# Altium PCB MB.PcbDoc (part 3 of 3)
Units mil, origin at the board's own origin, x right, y up, seen from the top; angles counter-clockwise.
Board outline 5718.69 x 3947.04 mil, 2 copper layers (Top Layer, Bottom Layer); 146 components, 154 nets, 660 pads, 249 vias.
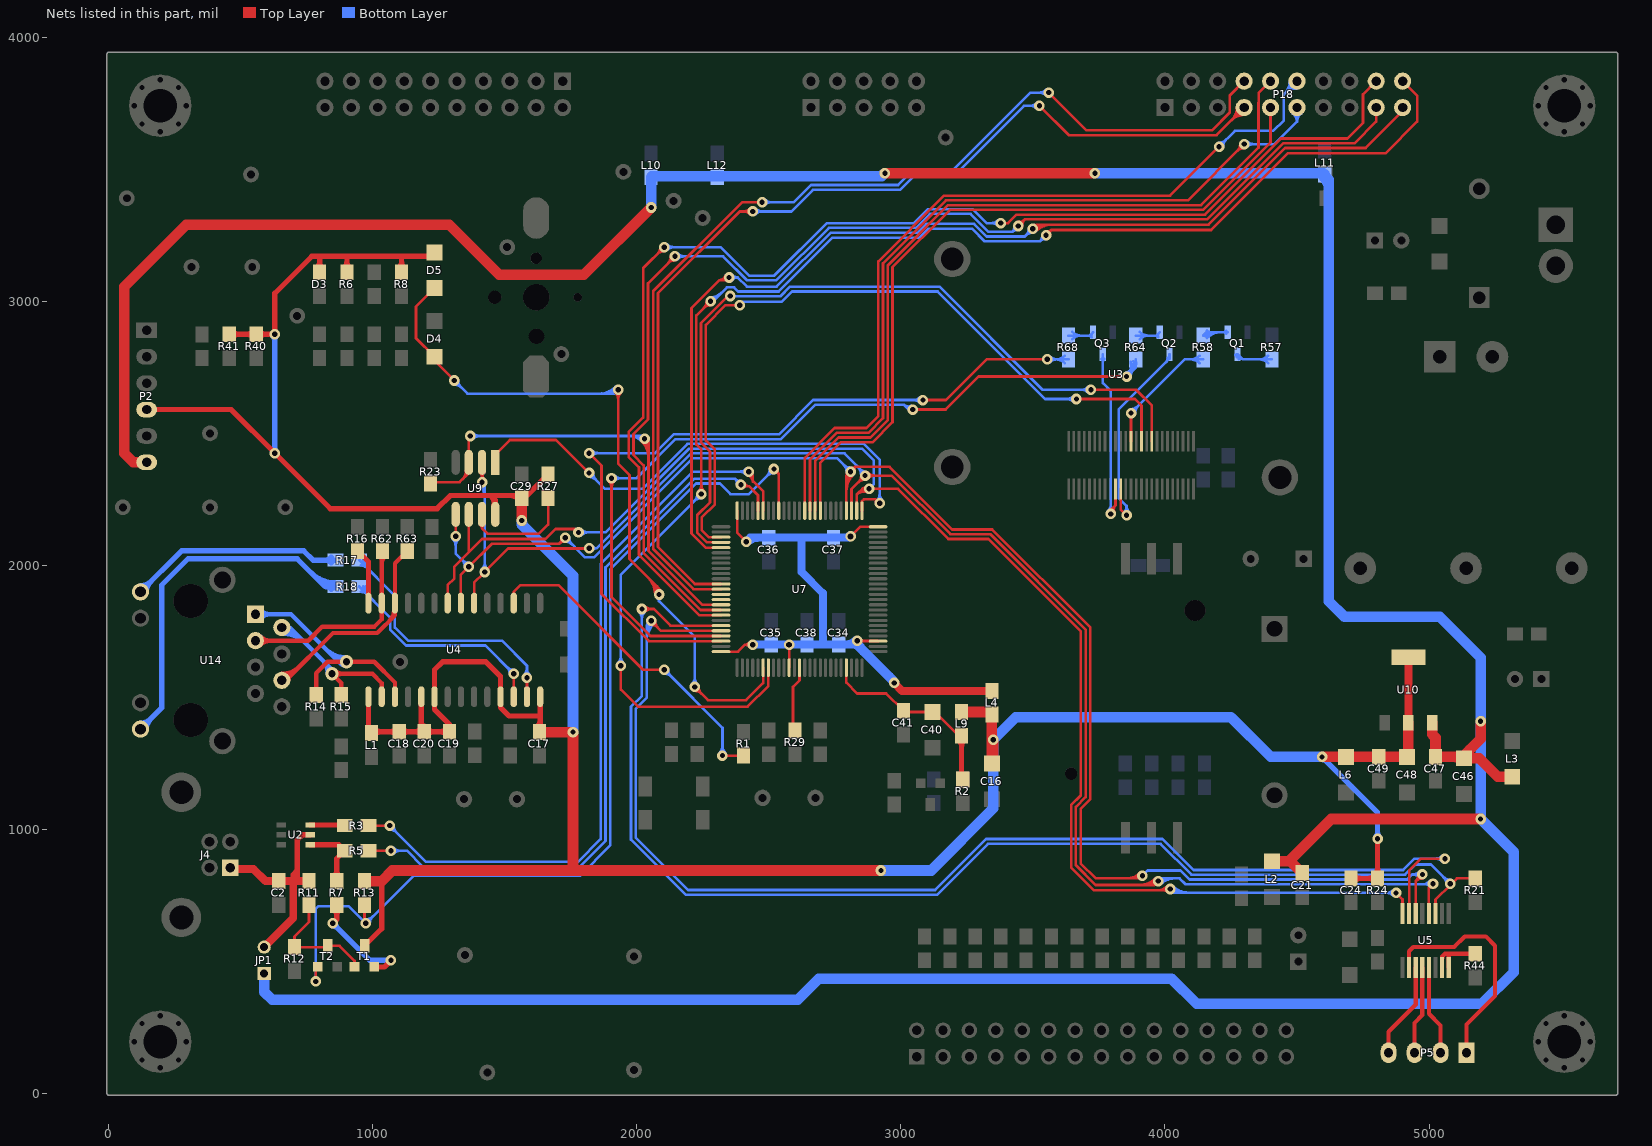
[diagram p3: the nets of this part, all layers, seen from the top]

## Via types
v1: diameter 40, hole 20, Top Layer to Bottom Layer, 190 vias
v2: diameter 50, hole 28, Top Layer to Bottom Layer, 49 vias
v3: diameter 40, hole 22, Top Layer to Bottom Layer, 5 vias
v4: diameter 50, hole 30, Top Layer to Bottom Layer, 4 vias
v5: diameter 80, hole 35, Top Layer to Bottom Layer, 1 vias

## Nets (pads, with @x,y where several pads share a name; then routed paths per layer and width w, separated by ;. In a path a pad name is that pad's centre, name@x,y a point inside that pad or via, vN(x,y) a via of type N, cw(c..) or ccw(c..) an arc to the next point about the centre after c; other vN are vias at no path point) (continued)
NetP18_7: P18.7 U7.87 | length 4200.9
  Top Layer w10: U7.87@2319.65,1929.72 2220.72,1929.72 2081,2069.44 2081,3030.54 2390.46,3340 v1(2440,3340) ; v1@2429.39,3329.39 ccw(c2403.79,3303.79) 2403.79,3340 ccw(c2403.79,3376.21) v1@2429.39,3350.61 ; v1(3525,3740) 3635.96,3629.04 4195.89,3629.04 P18.7@4300,3733.15 ; P18.7@4272.5,3733.15 cw(c4206.11,3733.15) 4253.05,3686.2 cw(c4300,3639.26) P18.7@4300,3705.65 ; P18.7@4282.5,3733.15 cw(c4240.25,3733.15) 4270.13,3703.28 cw(c4300,3673.4) P18.7@4300,3715.65
  Bottom Layer w10: v1(2440,3340) 2585.9,3340 2667.9,3422 2997.44,3422 3050.44,3475 3201.35,3475 3466.35,3740 v1(3525,3740) ; v1@2450.61,3329.39 cw(c2476.21,3303.79) 2476.21,3340 cw(c2476.21,3376.21) v1@2450.61,3350.61 ; v1@3514.39,3729.39 ccw(c3488.79,3703.79) 3488.79,3740 ccw(c3488.79,3776.21) v1@3514.39,3750.61
NetP18_8: P18.8 U7.88 | length 4131.9
  Top Layer w10: U7.88@2319.65,1910.04 2214.95,1910.04 2063,2061.99 2063,3038 2400,3375 v1(2475,3375) ; v1(3560,3790) 3702.96,3647.04 4178.24,3647.04 4245.5,3714.3 4245.5,3778.65 P18.8@4300,3833.15
  Bottom Layer w10: v1(2475,3375) 2595.44,3375 2660.44,3440 2989.99,3440 3042.99,3493 3193.9,3493 3490.9,3790 v1(3560,3790) ; v1@2485.61,3364.39 cw(c2511.21,3338.79) 2511.21,3375 cw(c2511.21,3411.21) v1@2485.61,3385.61 ; v1@3549.39,3779.39 ccw(c3523.79,3753.79) 3523.79,3790 ccw(c3523.79,3826.21) v1@3549.39,3800.61
NetP18_9: P18.9 U7.59 | length 2863.7
  Top Layer w10: U7.59@2695.63,2207.28 2695.63,2389.26 2772.37,2466 2892.37,2466 2968.87,2542.5 2968.87,3128.87 3186,3346 4144.63,3346 4400,3601.37 P18.9@4400,3733.15
NetP18_10: P18.10 U7.60 | length 2971.8
  Top Layer w10: U7.60@2675.94,2207.28 2675.94,2395.03 2764.91,2484 2884.91,2484 2950.87,2549.96 2950.87,3136.32 3178.54,3364 4137.18,3364 4354.5,3581.32 4354.5,3752.5 4355,3753 4355,3788.15 P18.10@4400,3833.15
NetP18_11: P18.11 U7.61 | length 3195.1
  Top Layer w10: U7.61@2656.26,2207.28 2656.26,2400.8 2757.46,2502 2877.46,2502 2932.87,2557.41 2932.87,3143.78 3171.09,3382 4087,3382 v1(4300,3595) ; v1@4285,3595 cw(c4248.79,3595) 4274.39,3569.39 cw(c4300,3543.79) v1@4300,3580
  Bottom Layer w10: v1(4300,3595) 4415,3595 4500,3680 ; v1@4310.61,3584.39 cw(c4336.21,3558.79) 4336.21,3595 cw(c4336.21,3631.21) v1@4310.61,3605.61 ; P18.11@4484.12,3710.7 cw(c4462.39,3680) 4500,3680 ; P18.11@4489.89,3718.86 cw(c4476.07,3699.33) 4500,3699.33 cw(c4523.93,3699.33) P18.11@4510.11,3718.86 ; P18.11@4500,3733.15 4500,3680 ; P18.11@4515.88,3710.7 ccw(c4537.61,3680) 4500,3680
NetP18_12: P18.12 U7.62 | length 3282.1
  Top Layer w10: U7.62@2636.57,2207.28 2636.57,2406.57 2750,2520 2870,2520 2914.87,2564.87 2914.87,3151.23 3163.63,3400 4020,3400 v1(4205,3585)
  Bottom Layer w10: v1(4205,3585) 4265,3645 4410,3645 4450,3685 4450,3783.15 P18.12@4500,3833.15 ; v1@4205,3600 ccw(c4205,3636.21) 4230.61,3610.61 ccw(c4256.21,3585) v1@4220,3585 ; P18.12@4472.5,3833.15 cw(c4406.11,3833.15) 4453.05,3786.2 cw(c4500,3739.26) P18.12@4500,3805.65 ; P18.12@4482.5,3833.15 cw(c4440.25,3833.15) 4470.13,3803.28 cw(c4500,3773.4) P18.12@4500,3815.65
NetP18_17: P18.17 U7.92 | length 4850.4
  Top Layer w10: v1@2130,3170 cw(c2093.79,3170) 2119.39,3144.39 cw(c2145,3118.79) v1@2145,3155 ; v1(2145,3170) 2043,3068 2043,2552.54 1988,2497.54 1988,2417.91 2027,2378.91 2027,2047.07 2242.78,1831.3 U7.92@2319.65,1831.3 ; v1(3445,3285) 3470,3310 ; v1@3445.26,3300 ccw(c3445.84,3334.15) 3470,3310 ; v1@3460,3285.26 cw(c3494.15,3285.84) 3470,3310 ; P18.17@4800,3733.15 4800,3680 4718,3598 4447.54,3598 4159.54,3310 3470,3310
  Bottom Layer w10: v1(2145,3170) 2327.88,3170 2418.88,3079 2528.54,3079 2727.54,3278 3057.09,3278 3110.09,3331 3264.91,3331 3332.91,3263 3423,3263 ; v1@2155.61,3159.39 cw(c2181.21,3133.79) 2181.21,3170 cw(c2181.21,3206.21) v1@2155.61,3180.61 ; v1@3430.1,3283.31 cw(c3405.49,3280.51) 3423,3263 ; v1@3443.31,3270.1 ccw(c3440.51,3245.49) 3423,3263 ; v1(3445,3285) 3423,3263
NetP18_18: P18.18 U7.93 | length 4965.1
  Top Layer w10: v1@2090,3205 cw(c2053.79,3205) 2079.39,3179.39 cw(c2105,3153.79) v1@2105,3190 ; v1(2105,3205) 2025,3125 2025,2560 1970,2505 1970,2410.46 2009,2371.46 2009,2039.62 2237,1811.61 U7.93@2319.65,1811.61 ; v1(3379,3296) 3406,3296 3438,3328 4152.09,3328 4440.09,3616 4691,3616 4750,3675 4750,3783.15 P18.18@4800,3833.15
  Bottom Layer w10: v1(2105,3205) 2318.33,3205 2426.33,3097 2521.09,3097 2720.09,3296 3049.63,3296 3102.63,3349 3272.37,3349 3325.37,3296 v1(3379,3296) ; v1@2115.61,3194.39 cw(c2141.21,3168.79) 2141.21,3205 cw(c2141.21,3241.21) v1@2115.61,3215.61 ; v1@3368.39,3285.39 ccw(c3342.79,3259.79) 3342.79,3296 ccw(c3342.79,3332.21) v1@3368.39,3306.61
NetP18_19: P18.19 U7.80 | length 4394
  Top Layer w10: U7.80@2319.65,2067.52 2261.11,2067.52 2208,2120.63 2208,2974.67 2313.33,3080 ; 2328,3080 ccw(c2328,3098.63) v1@2345.35,3091.83 ; v1@2336.04,3095.48 cw(c2313.33,3104.39) 2313.33,3080 ; v1(2350,3090) 2340,3080 2313.33,3080 ; v1@3496.46,3278.54 cw(c3524.14,3250.86) 3524.14,3290 ; v1(3500,3275) 3515,3290 ; v1@3503.54,3271.46 cw(c3548.28,3226.72) 3548.28,3290 ; v1@3506.47,3288.54 ccw(c3509.7,3295.3) 3515,3290 ; v1@3510.61,3264.39 cw(c3572.43,3202.57) 3572.43,3290 ; v1@3513.54,3281.47 cw(c3520.3,3284.7) 3515,3290 ; P18.19@4900,3733.15 4900,3720 4760,3580 4455,3580 4165,3290 3515,3290
  Bottom Layer w10: v1(2350,3090) 2382.42,3090 ; v1@2361.43,3080.29 cw(c2382.42,3062.47) 2382.42,3090 ; v1@2361.43,3099.71 ccw(c2382.42,3117.53) 2382.42,3090 ; v1@3485,3275 cw(c3448.79,3275) 3474.39,3249.39 cw(c3500,3223.79) v1@3500,3260 ; v1(3500,3275) 3470,3245 3325.46,3245 3277.46,3293 3097.54,3293 3064.54,3260 2735,3260 2530,3055 2417.42,3055 2382.42,3090
NetP18_20: P18.20 U7.7 | length 5894.6
  Top Layer w10: v1(1940,1620) 1940,1530 2005,1465 2420,1465 2498.78,1543.78 U7.7@2498.78,1612.8 ; v1@2234.39,2280.61 ccw(c2208.79,2306.21) 2245,2306.21 ccw(c2281.21,2306.21) v1@2255.61,2280.61 ; v1(2245,2270) 2245,2438.63 2226,2457.63 2226,2946 v1(2280,3000) ; v1@2265,3000 cw(c2228.79,3000) 2254.39,2974.39 cw(c2280,2948.79) v1@2280,2985 ; v1(3550,3250) 3570,3270 ; v1@3552.83,3264.73 ccw(c3556.45,3283.55) 3570,3270 ; v1@3564.73,3252.83 cw(c3583.55,3256.45) 3570,3270 ; P18.20@4900,3833.15 4955,3778.15 4955,3680 4835,3560 4465,3560 4175,3270 3570,3270
  Bottom Layer w10: v1@1929.39,1630.61 ccw(c1903.79,1656.21) 1940,1656.21 ccw(c1976.21,1656.21) v1@1950.61,1630.61 ; v1(1940,1620) 1940,1965 v1(2245,2270) ; v1@2230,2270 cw(c2193.79,2270) 2219.39,2244.39 cw(c2245,2218.79) v1@2245,2255 ; v1(2280,3000) 2288.33,3000 2341.33,3053 2368.67,3053 2384.67,3037 2537.46,3037 2740.46,3240 3070,3240 3105,3275 3270,3275 3318,3227 3527,3227 ; v1@2280,3005 ccw(c2280,3037.18) 2302.76,3014.43 ; v1@2280,3015 ccw(c2280,3071.33) 2319.83,3031.5 ; v1@2295,3000 cw(c2311.1,3000) 2299.72,3011.38 ; v1@3535.05,3248.82 cw(c3507.37,3246.63) 3527,3227 ; v1@3548.82,3235.05 ccw(c3546.63,3207.37) 3527,3227 ; v1(3550,3250) 3527,3227
NetQ1_1: Q1.1 R58.2 | length 239.1
  Bottom Layer w10: R58.2@4145,2870 4157.68,2882.68 Q1.1@4237.6,2882.68 ; R58.2@4152.07,2867.93 cw(c4187.68,2832.32) 4187.68,2882.68 ; R58.2@4159.14,2860.86 cw(c4211.82,2808.18) 4211.82,2882.68 ; R58.2@4159.14,2889.14 ccw(c4174.75,2904.75) 4174.75,2882.68 ; Q1.1@4232.78,2877.86 ccw(c4221.16,2866.23) 4221.16,2882.68 ccw(c4221.16,2899.12) Q1.1@4232.78,2887.49
NetQ1_3: Q1.3 R57.1 | length 260.4
  Bottom Layer w10: Q1.3@4266.79,2796.54 cw(c4272.58,2789.26) Q1.3@4279.16,2795.84 ; Q1.3@4273.01,2788.72 cw(c4279.6,2780.44) 4287.08,2787.92 ; Q1.3@4275,2800 4295,2780 ; Q1.3@4279.24,2780.89 cw(c4286.62,2771.62) 4295,2780 ; R57.1@4390.86,2765.86 ccw(c4356.72,2731.72) 4356.72,2780 ccw(c4356.72,2828.28) R57.1@4390.86,2794.14 ; R57.1@4405,2780 4295,2780
NetQ2_1: Q2.1 R64.2 | length 213.6
  Bottom Layer w10: R64.2@3890,2870 3967.6,2870 ; R64.2@3904.14,2855.86 cw(c3938.28,2821.72) 3938.28,2870 cw(c3938.28,2918.28) R64.2@3904.14,2884.14 ; 3960.9,2870 cw(c3960.9,2849.52) Q2.1@3975.38,2864 ; 3966.61,2870 ccw(c3966.61,2882.41) Q2.1@3975.38,2873.64 ; Q2.1@3974.04,2865.92 ccw(c3967.6,2862.89) 3967.6,2870 ; Q2.1@3975.12,2873.36 cw(c3967.6,2880.1) 3967.6,2870 ; Q2.1@3980.2,2882.6 3967.6,2870
NetQ2_3: Q2.3 U3.40 | length 884.2
  Top Layer w10: U3.40@3832.41,2289.08 3832.41,2212.59 v1(3855,2190)
  Bottom Layer w10: v1@3844.66,2200.86 ccw(c3821.67,2225) 3855,2225 ; v1(3855,2190) 3855,2225 ; v1@3865.34,2200.86 cw(c3888.33,2225) 3855,2225 ; 4003.47,2768.47 ccw(c3985.79,2786.14) Q2.3@4010.79,2786.14 ; Q2.3@4017.6,2799.92 4017.6,2782.6 3825,2590 3825,2255 3855,2225
NetQ3_1: Q3.1 R68.2 | length 216
  Bottom Layer w10: R68.2@3635,2870 3715,2870 ; R68.2@3649.14,2855.86 cw(c3683.28,2821.72) 3683.28,2870 cw(c3683.28,2918.28) R68.2@3649.14,2884.14 ; 3708.3,2870 cw(c3708.3,2849.52) Q3.1@3722.78,2864 ; 3714.01,2870 ccw(c3714.01,2882.41) Q3.1@3722.78,2873.64 ; Q3.1@3721.44,2865.92 ccw(c3715,2862.89) 3715,2870 ; Q3.1@3722.52,2873.36 cw(c3715,2880.1) 3715,2870 ; Q3.1@3727.6,2882.6 3715,2870
NetQ3_3: Q3.3 U3.41 | length 852
  Top Layer w10: v1(3795,2195) 3795,2210 3812.73,2227.73 ; v1@3799.48,2197.22 cw(c3815.57,2205.18) 3802.87,2217.87 ; v1@3808.44,2201.66 cw(c3828.74,2211.71) 3812.73,2227.73 ; U3.41@3812.73,2289.08 3812.73,2227.73
  Bottom Layer w10: Q3.3@3760.18,2781.33 cw(c3748.56,2769.7) 3765,2769.7 cw(c3781.44,2769.7) Q3.3@3769.82,2781.33 ; Q3.3@3765,2799.92 3765,2690 3795,2660 v1(3795,2195) ; v1@3784.39,2205.61 ccw(c3758.79,2231.21) 3795,2231.21 ccw(c3831.21,2231.21) v1@3805.61,2205.61
NetR1_2: R1.2 U4.3 | length 1388.1
  Top Layer w10: U4.3@1530.35,1889.92 ccw(c1521.65,1899.84) 1534.84,1899.84 ; U4.3@1534.84,1857.24 1534.84,1899.84 ; U4.3@1539.33,1889.92 cw(c1548.04,1899.84) 1534.84,1899.84 ; v1(2105,1605) 2025,1605 1705,1925 1560,1925 1534.84,1899.84 ; v1(2325,1280) R1.2@2405,1280
  Bottom Layer w10: v1@2105,1590 cw(c2105,1553.79) 2130.61,1579.39 cw(c2156.21,1605) v1@2120,1605 ; v1(2105,1605) 2325,1385 v1(2325,1280) ; v1@2314.39,1290.61 ccw(c2288.79,1316.21) 2325,1316.21 ccw(c2361.21,1316.21) v1@2335.61,1290.61
NetR3_1: R3.1 U7.70 | length 3080.8
  Top Layer w10: R3.1@985,1015 v1(1065,1015) ; v1@2421.49,2340.42 cw(c2415.84,2316.92) 2440,2316.92 ; v1@2423.83,2350.14 cw(c2418.89,2329.62) 2440,2329.62 ; v1(2425,2355) 2440,2340 ; v1@2431.47,2341.46 cw(c2434.7,2334.7) 2440,2340 ; v1@2438.54,2348.53 ccw(c2445.3,2345.3) 2440,2340 ; U7.70@2479.09,2207.28 2479.09,2280.91 2440,2320 2440,2340
  Bottom Layer w10: v1@1065,1000 cw(c1065,963.79) 1090.61,989.39 cw(c1116.21,1015) v1@1080,1015 ; v1(1065,1015) 1202,878 1777.54,878 1864,964.46 1864,2004.91 2214.09,2355 v1(2425,2355) ; v1@2414.39,2344.39 ccw(c2388.79,2318.79) 2388.79,2355 ccw(c2388.79,2391.21) v1@2414.39,2365.61
NetR3_2: R3.2 U2.6 | length 127.6
  Top Layer w20: U2.6@765,1017.4 R3.2@892.6,1017.4
NetR5_1: R5.1 U7.71 | length 2936.5
  Top Layer w10: R5.1@985,920 v1(1070,920) ; v1@2395,2300 2425,2300 ; v1@2405.61,2294.39 cw(c2419.14,2280.86) 2419.14,2300 ; v1@2408.85,2310.77 ccw(c2425,2317.5) 2425,2300 ; U7.71@2459.41,2207.28 2459.41,2265.59 2425,2300
  Bottom Layer w10: v1(1070,920) 1130,920 1190,860 1785,860 1882,957 1882,1992.46 2217.54,2328 2372,2328 ; v1@1080.61,909.39 cw(c1106.21,883.79) 1106.21,920 cw(c1106.21,956.21) v1@1080.61,930.61 ; v1@2380.05,2306.18 ccw(c2352.37,2308.37) 2372,2328 ; v1@2393.82,2319.95 cw(c2391.63,2347.63) 2372,2328 ; v1(2395,2305) 2372,2328
NetR5_2: R5.2 R7.1 U2.4 | length 323.7
  Top Layer w20: U2.4@765,942.6 872.4,942.6 R5.2@895,920 865,890 R7.1@865,805 ; R7.1@854.39,820.61 ccw(c828.79,846.21) 865,846.21 ccw(c901.21,846.21) R7.1@875.61,820.61
NetR7_2: R7.2 T1.2 | length 553.2
  Top Layer w20: v1(850,645) 865,660 ; v1@850.96,654.95 ccw(c852.63,672.37) 865,660 ; R7.2@854.39,699.39 cw(c828.79,673.79) 865,673.79 cw(c901.21,673.79) R7.2@875.61,699.39 ; v1@859.95,645.96 cw(c877.37,647.63) 865,660 ; R7.2@865,715 865,660 ; T1.2@1007,480 1045,480 v1(1070,505)
  Bottom Layer w20: v1@850,635 cw(c850,610.86) 867.07,627.93 cw(c884.14,645) v1@860,645 ; v1(850,645) 990,505 v1(1070,505)
NetR11_1: R11.1 R12.2 T1.1 T2.3 | length 428.5
  Top Layer w10: R12.2@705,555 825,555 T2.3@830,560 875,560 932,503 T1.1@932,480 ; 705,585 705,595 760,650 R11.1@760,715
NetR13_1: R13.1 T2.1 U7.67 | length 3838.4
  Top Layer w10: v1(785,425) 785,473 T2.1@792,480 ; R13.1@970,715 970,650 v1(975,645) ; v1(2520,2365) 2538.15,2346.85 ; v1@2524.04,2350.55 cw(c2527.92,2336.63) 2538.15,2346.85 ; v1@2534.45,2360.96 ccw(c2548.37,2357.08) 2538.15,2346.85 ; U7.67@2538.15,2207.28 2538.15,2346.85
  Bottom Layer w10: v1(785,425) 785,700 795,710 910,710 v1(975,645) 1155,825 1785,825 1900,940 1900,1985 2225,2310 2315,2310 2355,2270 2425,2270 v1(2520,2365) ; v1@975,660 ccw(c975,696.21) 1000.61,670.61 ccw(c1026.21,645) v1@990,645 ; v1@2505,2365 cw(c2468.79,2365) 2494.39,2339.39 cw(c2520,2313.79) v1@2520,2350
NetR14_2: R14.2 U4.17 U14.1 | length 1210
  Top Layer w16: R14.2@786.89,1510.04 786.89,1591.93 830,1635.04 v2(901.89,1635.04) 1006.89,1635.04 1084.84,1557.09 U4.17@1084.84,1502.91
  Bottom Layer w16: U14.1@556.89,1815.04 691.89,1815.04 871.89,1635.04 ; U14.1@574.21,1797.72 cw(c616.04,1755.89) 616.04,1815.04 cw(c616.04,1874.19) U14.1@574.21,1832.36 ; 821.66,1685.27 ccw(c901.89,1765.51) v2@901.89,1652.04 ; 848.97,1657.96 ccw(c901.89,1710.88) v2@901.89,1636.04 ; 876.28,1630.65 ccw(c901.89,1656.25) v2@901.89,1620.04 ; v2@887.31,1626.3 ccw(c871.89,1617.07) 871.89,1635.04 ; v2@887.31,1643.77 cw(c871.89,1653.01) 871.89,1635.04 ; v2(901.89,1635.04) 871.89,1635.04
NetR15_2: R15.2 U4.16 U14.2 | length 994.8
  Top Layer w16: v2@858.91,1578.02 cw(c887.93,1549) 887.93,1590.04 cw(c887.93,1631.08) v2@858.91,1602.06 ; R15.2@881.89,1510.04 881.89,1555.04 v2(846.89,1590.04) 999.84,1590.04 1034.84,1555.04 U4.16@1034.84,1502.91
  Bottom Layer w16: U14.2@656.89,1740.54 cw(c656.89,1608.96) 749.93,1702 ; U14.2@656.89,1756.54 cw(c656.89,1663.59) 722.61,1729.32 ; U14.2@656.89,1765.04 686.89,1765.04 846.89,1605.04 v2(846.89,1590.04) ; U14.2@656.89,1772.54 cw(c656.89,1718.22) 695.3,1756.63 ; 807.26,1644.67 cw(c752.63,1590.04) v2@829.89,1590.04 ; 834.58,1617.35 cw(c807.26,1590.04) v2@845.89,1590.04
NetR16_2: R16.2 U4.14 | length 214.8
  Top Layer w20: R16.2@943.89,2055.04 984.84,2014.09 U4.14@984.84,1857.24
NetR17_1: R17.1 U14.9 | length 958.9
  Bottom Layer w20: U14.9@121.97,1900.08 276.93,2055.04 740,2055.04 775.04,2020 R17.1@860,2020 ; U14.9@121.97,1922.58 ccw(c121.97,1976.9) 160.38,1938.49 ccw(c198.79,1900.08) U14.9@144.47,1900.08 ; R17.1@844.39,2009.39 ccw(c818.79,1983.79) 818.79,2020 ccw(c818.79,2056.21) R17.1@844.39,2030.61
NetR17_2: R17.2 U4.27 | length 1175
  Top Layer w10: U4.27@1580.03,1535.29 ccw(c1568.4,1546.92) 1584.84,1546.92 ccw(c1601.29,1546.92) U4.27@1589.66,1535.29 ; U4.27@1584.84,1502.91 v1(1584.84,1574.84)
  Bottom Layer w10: R17.2@950,2020 1085,1885 1085,1765 1135,1715 1490,1715 1584.84,1620.16 v1(1584.84,1574.84) ; R17.2@955,2000 cw(c955,1963.79) 980.61,1989.39 ; R17.2@965,2020 ccw(c1001.21,2020) 975.61,1994.39 ; R17.2@975,2020 ccw(c1035.36,2020) 992.68,1977.32 ; v1@1574.24,1585.45 ccw(c1548.63,1611.06) 1584.84,1611.06 ccw(c1621.06,1611.06) v1@1595.45,1585.45
NetR18_1: R18.1 U14.12 | length 1612.1
  Bottom Layer w20: U14.12@121.97,1380.08 201.89,1460 201.89,1925.04 301.89,2025.04 714.96,2025.04 820,1920 ; U14.12@121.97,1402.58 ccw(c121.97,1456.9) 160.38,1418.49 ccw(c198.79,1380.08) U14.12@144.47,1380.08 ; 769.64,1970.36 ccw(c855,2055.71) R18.1@855,1935 ; 803.79,1936.21 ccw(c855,1987.43) R18.1@855,1915 ; R18.1@844.14,1909.66 ccw(c820,1886.67) 820,1920 ; R18.1@844.14,1930.34 cw(c820,1953.33) 820,1920 ; R18.1@860,1920 820,1920
NetR18_2: R18.2 U4.26 | length 996.3
  Top Layer w10: U4.26@1534.84,1502.91 v1(1534.84,1589.84)
  Bottom Layer w10: R18.2@950,1920 1067,1803 1067,1757.54 1127.54,1697 1427.69,1697 v1(1534.84,1589.84) ; R18.2@955,1900 cw(c955,1863.79) 980.61,1889.39 ; R18.2@965,1920 ccw(c1001.21,1920) 975.61,1894.39 ; R18.2@975,1920 ccw(c1035.36,1920) 992.68,1877.32 ; v1@1519.84,1589.84 ccw(c1483.63,1589.84) 1509.24,1615.45 ccw(c1534.84,1641.06) v1@1534.84,1604.84
NetR21_1: R21.1 U5.11 U7.95 | length 4988.1
  Top Layer w10: v1(2020,1835) 2065,1835 2127.76,1772.24 U7.95@2319.65,1772.24 ; v1@2030.61,1824.39 cw(c2056.21,1798.79) 2056.21,1835 cw(c2056.21,1871.21) v1@2030.61,1845.61 ; U5.11@5024.39,682.4 5024.39,734.39 v1@5082.5,792.5 ; v1(5080,795) v1@5082.5,792.5 ; R21.1@5175,815 5105,815 v1@5082.5,792.5
  Bottom Layer w10: v1@2009.39,1824.39 cw(c1983.79,1798.79) 2020,1798.79 cw(c2056.21,1798.79) v1@2030.61,1824.39 ; v1(2020,1835) 2020,1506 1979,1465 1979,961.46 2187.46,753 3137.54,753 3330.54,946 3983.54,946 4100.54,829 4909.46,829 4947.96,867.5 5007.5,867.5 v1(5080,795) ; v1@5065,795 ccw(c5028.79,795) 5054.39,820.61 ccw(c5080,846.21) v1@5080,810
NetR23_1: R23.1 U7.91 U9.3 | length 2128.5
  Top Layer w10: R23.1@1220,2310 1225,2315 1330,2315 1365,2350 U9.3@1365,2390 1365,2485 v1(1370,2490) ; 1340.64,2325.64 ccw(c1307.77,2358.5) U9.3@1354.25,2358.5 ; 1357.71,2342.71 ccw(c1341.92,2358.5) U9.3@1364.25,2358.5 ; v1@2019.39,2469.39 cw(c1957.57,2407.57) 2045,2407.57 ; v1@2026.46,2476.46 cw(c1981.72,2431.72) 2045,2431.72 ; v1(2030,2480) 2045,2465 ; v1@2033.54,2483.54 cw(c2005.86,2455.86) 2045,2455.86 ; v1@2036.47,2466.46 cw(c2039.7,2459.7) 2045,2465 ; v1@2043.54,2473.53 ccw(c2050.3,2470.3) 2045,2465 ; U7.91@2319.65,1850.98 2248.55,1850.98 2045,2054.53 2045,2465
  Bottom Layer w10: v1(1370,2490) 2020,2490 v1(2030,2480) ; v1@1380.61,2479.39 cw(c1406.21,2453.79) 1406.21,2490 cw(c1406.21,2526.21) v1@1380.61,2500.61 ; 1969.64,2490 cw(c1969.64,2419.64) v1@2019.39,2469.39 ; 1993.79,2490 cw(c1993.79,2443.79) v1@2026.46,2476.46
NetR27_1: R27.1 U9.7 | length 421.2
  Top Layer w10: U9.7@1408.5,2153.09 cw(c1398.56,2140) 1415,2140 ; U9.7@1415,2158.15 1415,2140 ; U9.7@1421.5,2153.09 ccw(c1431.44,2140) 1415,2140 ; R27.1@1665,2255 1665,2155 1630,2120 1435,2120 1415,2140
NetR29_1: R29.1 U7.13 | length 251.4
  Top Layer w10: R29.1@2600,1375 2600,1390 2592,1398 2592,1540.11 2616.89,1565 U7.13@2616.89,1612.8
NetR44_2: R44.2 U5.7 U5.8 | length 237.6
  Top Layer w16: U5.7@5049.26,509.17 cw(c5073.62,509.17) 5056.4,526.4 ; U5.7@5049.39,477.68 5049.39,519.39 5060,530 R44.2@5175,530 ; U5.8@5074.39,477.68 5074.39,524.39
NetR58_1: R58.1 U3.13 | length 596.7
  Top Layer w10: U3.13@3871.78,2470.19 v1(3871.78,2576.78)
  Bottom Layer w10: v1(3871.78,2576.78) 4075,2780 R58.1@4145,2780 ; v1@3871.78,2591.78 ccw(c3871.78,2627.99) 3897.39,2602.39 ccw(c3922.99,2576.78) v1@3886.78,2576.78 ; R58.1@4130.86,2765.86 ccw(c4096.72,2731.72) 4096.72,2780 ccw(c4096.72,2828.28) R58.1@4130.86,2794.14
NetR62_2: R62.2 U4.13 U14.3 | length 929.8
  Top Layer w16: U14.3@556.89,1715.04 756.89,1715.04 810.06,1768.21 1008.21,1768.21 1034.84,1794.84 U4.13@1034.84,1857.24 1034.84,2051.99 R62.2@1037.89,2055.04 ; U14.3@574.21,1697.72 cw(c616.04,1655.89) 616.04,1715.04 cw(c616.04,1774.19) U14.3@574.21,1732.36 ; R62.2@1025.87,2038.02 cw(c1004.2,2016.35) 1034.84,2016.35 ; 1034.84,2001.64 cw(c1086.29,2001.64) R62.2@1049.91,2038.02
NetR63_2: R63.2 U4.12 U14.6 | length 973.7
  Top Layer w16: U14.6@656.89,1565.04 671.89,1565.04 851.06,1744.21 1018.15,1744.21 1084.84,1810.9 U4.12@1084.84,1857.24 1084.84,2007.99 R63.2@1131.89,2055.04 ; U14.6@656.89,1573.54 ccw(c656.89,1630.27) 697.01,1590.16 ; U14.6@656.89,1589.54 ccw(c656.89,1684.9) 724.32,1617.47 ; U14.6@681.39,1565.04 cw(c704.32,1565.04) 688.11,1581.26 ; 1065.05,1791.11 ccw(c1026.48,1829.68) U4.12@1081.03,1829.68
NetR64_1: R64.1 U7.97 | length 3615
  Top Layer w10: v1@1894.39,2319.39 cw(c1868.79,2293.79) 1905,2293.79 cw(c1941.21,2293.79) v1@1915.61,2319.39 ; v1(1905,2330) 1905,1880 2052.13,1732.87 U7.97@2319.65,1732.87 ; v1(3045,2590) 3170,2590 3295,2715 v1(3855,2715)
  Bottom Layer w10: v1(1905,2330) 2000,2330 2148,2478 2546,2478 2676,2608 3012,2608 ; v1@1915.61,2319.39 cw(c1941.21,2293.79) 1941.21,2330 cw(c1941.21,2366.21) v1@1915.61,2340.61 ; 3021.96,2598.04 ccw(c3034.88,2610.97) v1@3042.83,2594.5 ; v1@3038.48,2603.51 cw(c3028.4,2624.4) 3012,2608 ; v1(3045,2590) 3030,2590 3012,2608 ; v1@3851.74,2729.64 ccw(c3841.82,2774.16) R64.1@3881.32,2751.35 ; v1@3853.05,2729.87 ccw(c3850.02,2752.97) 3870.2,2741.32 ccw(c3890.37,2729.67) v1@3868.86,2720.75 ; v1@3853.91,2719.88 ccw(c3848.54,2744) 3869.94,2731.64 ; v1@3855,2730 ccw(c3855,2766.21) 3880.61,2740.61 ccw(c3906.21,2715) v1@3870,2715 ; v1@3867.61,2727.61 ccw(c3833.79,2761.43) R64.1@3880.28,2772.65 ; v1@3869.49,2718.88 cw(c3889.25,2724.18) 3871.53,2734.41 ; R64.1@3870.56,2770.31 cw(c3813.48,2756.52) v1(3855,2715) 3890,2750 R64.1@3890,2780 ; 3880.21,2740.21 ccw(c3854.1,2766.33) R64.1@3890,2775
NetR68_1: R68.1 U7.98 | length 3287.4
  Top Layer w10: v1(1820,2425) 1867,2378 1867,1892.54 2046.36,1713.19 U7.98@2319.65,1713.19 ; v1(3084,2626) 3171,2626 3325,2780 v1(3555,2780)
  Bottom Layer w10: v1(1820,2425) 2069.54,2425 2140.54,2496 2538.54,2496 2668.54,2626 v1(3084,2626) ; v1@1830.61,2414.39 cw(c1856.21,2388.79) 1856.21,2425 cw(c1856.21,2461.21) v1@1830.61,2435.61 ; v1@3073.39,2615.39 ccw(c3047.79,2589.79) 3047.79,2626 ccw(c3047.79,2662.21) v1@3073.39,2636.61 ; v1(3555,2780) R68.1@3635,2780 ; v1@3565.61,2769.39 cw(c3591.21,2743.79) 3591.21,2780 cw(c3591.21,2816.21) v1@3565.61,2790.61 ; R68.1@3620.86,2765.86 ccw(c3586.72,2731.72) 3586.72,2780 ccw(c3586.72,2828.28) R68.1@3620.86,2794.14
NetU3_15: U3.15 U7.78 | length 2967.4
  Top Layer w10: U7.78@2319.65,2106.89 2272.65,2106.89 2247,2132.54 2247,2182.46 2296,2231.46 2296,2438.54 2262,2472.54 2262,2909.88 2337.12,2985 v1(2390,2985) ; v1(3665,2630) 3886.15,2630 3911.15,2605 U3.15@3911.15,2470.19
  Bottom Layer w10: v1(2390,2985) 2403.63,2998.63 2550,2998.63 2588.37,3037 3139.84,3037 3546.84,2630 v1(3665,2630) ; v1@3654.39,2619.39 ccw(c3628.79,2593.79) 3628.79,2630 ccw(c3628.79,2666.21) v1@3654.39,2640.61
NetU3_17: U3.17 U7.79 | length 3075.1
  Top Layer w10: U7.79@2319.65,2087.2 2266.88,2087.2 2229,2125.09 2229,2189.91 2278,2238.91 2278,2431.09 2244,2465.09 2244,2917.33 2346.67,3020 v1(2355,3020) ; v1(3720,2665) 3890,2665 3950.52,2604.48 U3.17@3950.52,2470.19
  Bottom Layer w10: v1(2355,3020) 2356,3019 2544.91,3019 2580.91,3055 3147.29,3055 3537.29,2665 v1(3720,2665) ; v1@3709.39,2654.39 ccw(c3683.79,2628.79) 3683.79,2665 ccw(c3683.79,2701.21) v1@3709.39,2675.61
NetU5_15: U5.15 U7.96 | length 5011.9
  Top Layer w10: v1@2055,1775 cw(c2055,1738.79) 2080.61,1764.39 cw(c2106.21,1790) v1@2070,1790 ; v1(2055,1790) 2092.44,1752.56 U7.96@2319.65,1752.56 ; U5.15@4924.39,682.4 4924.39,844.39 4970,890 v1(5060,890)
  Bottom Layer w10: 2038,1712.75 cw(c2132.25,1712.75) v1@2065.61,1779.39 ; 2038,1736.89 cw(c2108.11,1736.89) v1@2058.54,1786.46 ; 2038,1761.03 cw(c2083.97,1761.03) v1@2051.46,1793.54 ; v1(2055,1790) 2038,1773 2038,1498.54 1997,1457.54 1997,968.91 2194.91,771 3130.09,771 3323.09,964 3991,964 4108,847 4902,847 4945,890 v1(5060,890) ; v1@5049.39,879.39 ccw(c5023.79,853.79) 5023.79,890 ccw(c5023.79,926.21) v1@5049.39,900.61
NetU7_51: U7.51 U9.1 | length 2089
  Top Layer w10: U9.1@1465,2390 1465,2420 1520,2475 1695,2475 v1(1820,2350) ; U7.51@2853.11,2207.28 2853.11,2243.11 2860,2250 2905,2250 ; v1@2906.46,2241.47 ccw(c2899.7,2244.7) 2905,2250 ; v1@2913.53,2248.54 cw(c2910.3,2255.3) 2905,2250 ; v1(2920,2235) 2905,2250
  Bottom Layer w10: v1@1820,2335 cw(c1820,2298.79) 1845.61,2324.39 cw(c1871.21,2350) v1@1835,2350 ; v1(1820,2350) 1880,2290 2021.81,2290 2191.81,2460 2860.46,2460 2920,2400.46 v1(2920,2235) ; v1@2909.39,2245.61 ccw(c2883.79,2271.21) 2920,2271.21 ccw(c2956.21,2271.21) v1@2930.61,2245.61
NetU7_89: U7.89
NetU7_90: U7.90
SPI_MISO: U4.6 U5.12 U7.53 U9.2 | length 6698.6
  Top Layer w10: U4.6@1384.84,1857.24 1384.84,1934.84 v1@1420,1970 ; U9.2@1407.4,2350.9 cw(c1389.05,2332.56) 1415,2332.56 cw(c1440.95,2332.56) U9.2@1422.6,2350.9 ; v1@1408.62,2328.57 ccw(c1402.46,2341.67) 1416.44,2337.93 ccw(c1423.92,2335.92) v1@1420.88,2328.8 ; v1@1409.12,2328.8 ccw(c1406.08,2335.92) 1413.56,2337.93 ccw(c1427.54,2341.67) v1@1421.38,2328.57 ; v1(1415,2315) U9.2@1415,2390 ; v1(1425,1975) 1514,2064 1819.91,2064 v1(1820.46,2064.54) ; U7.53@2813.74,2207.28 2813.74,2288.74 v1(2865,2340) 2965.46,2340 3187.46,2118 3338.81,2118 3699.9,1756.91 3699.9,1122.46 3663,1085.56 3663,864.88 3737.88,790 3960,790 ; v1@2850,2340 cw(c2813.79,2340) 2839.39,2314.39 cw(c2865,2288.79) v1@2865,2325 ; v1@2875.61,2329.39 cw(c2901.21,2303.79) 2901.21,2340 cw(c2901.21,2376.21) v1@2875.61,2350.61 ; 3902.57,790 ccw(c3902.57,877.43) v1@3964.39,815.61 ; 3926.72,790 ccw(c3926.72,853.28) v1@3971.46,808.54 ; 3950.86,790 ccw(c3950.86,829.14) v1@3978.54,801.46 ; v1@3961.46,798.53 cw(c3954.7,795.3) 3960,790 ; v1@3968.53,791.46 ccw(c3965.3,784.7) 3960,790 ; v1(3975,805) 3960,790 ; v1@5001.23,789.04 cw(c4993.21,785.57) 4999.39,779.39 ; U5.12@5001.89,684.9 U5.12@4999.39,682.4 4999.39,779.39 ; v1@5009.04,781.23 ccw(c5005.57,773.21) 4999.39,779.39 ; v1(5015,795) 4999.39,779.39
  Bottom Layer w10: v1@1404.39,2304.39 cw(c1354.64,2254.64) 1425,2254.64 ; v1@1411.46,2311.46 cw(c1378.79,2278.79) 1425,2278.79 ; v1@1414.39,1985.61 ccw(c1388.79,2011.21) 1425,2011.21 ccw(c1461.21,2011.21) v1@1435.61,1985.61 ; v1(1425,1975) 1425,2295 ; v1(1820.46,2064.54) 1847.27,2064.54 ; v1@1833.24,2056.7 cw(c1847.26,2048.09) 1847.26,2064.54 ; v1@1833.24,2072.39 ccw(c1847.26,2081) 1847.26,2064.54 ; 2834.68,2376.99 cw(c2797.69,2340) v1@2850,2340 ; 2850.78,2360.89 ccw(c2865,2375.11) v1@2865,2355 ; 2851.75,2359.92 cw(c2831.83,2340) v1@2860,2340 ; v1(2865,2340) 2865,2346.67 2787.67,2424 2206.72,2424 1847.27,2064.54 ; v1(3975,805) 3985,815 4055,815 4077,793 5013,793 v1(5015,795) ; v1@3978.54,801.46 cw(c4011.21,768.79) 4011.21,815 ; v1@3985.61,794.39 cw(c4035.36,744.64) 4035.36,815 ; 4973.96,793 ccw(c4973.96,836.04) v1@5004.39,805.61 ; 4983.62,793 cw(c4983.62,763.62) v1@5004.39,784.39 ; 1425,2295 1415,2305 v1(1415,2315) 1425,2305 1425,2295
SPI_MOSI: U4.7 U5.14 U7.54 U9.5 | length 6453.5
  Top Layer w10: v1(1315,2110) U9.5@1315,2158.15 ; U4.7@1334.84,1857.24 1334.84,1964.84 v1@1360,1990 ; v1(1365,1995) 1452,2082 1707,2082 ; v1@1715.05,2103.82 cw(c1687.37,2101.63) 1707,2082 ; v1@1728.82,2090.05 ccw(c1726.63,2062.37) 1707,2082 ; v1(1730,2105) 1707,2082 ; U7.54@2794.06,2207.28 2794.06,2339.06 ; 2794.06,2280.29 cw(c2884.71,2280.29) v1@2820.61,2344.39 ; 2794.06,2304.43 cw(c2860.57,2304.43) v1@2813.54,2351.46 ; 2794.05,2328.58 cw(c2836.42,2328.58) v1@2806.46,2358.54 ; v1@2796.12,2349.32 cw(c2787.38,2345.74) 2794.06,2339.06 ; v1@2804.32,2341.12 ccw(c2800.74,2332.38) 2794.06,2339.06 ; v1@2814.14,2369.42 ccw(c2818.03,2382.97) 2828,2373 ; v1@2824.42,2359.14 cw(c2837.97,2363.03) 2828,2373 ; 3854.64,815 ccw(c3854.64,885.36) v1@3904.39,835.61 ; 3878.79,815 ccw(c3878.79,861.21) v1@3911.46,828.54 ; v1(3915,825) 3905,815 3738.33,815 3681,872.33 3681,1078.1 3717.9,1115 3717.9,1764.37 3346.27,2136 3194.91,2136 2957.91,2373 2828,2373 ; U5.14@4949.39,682.4 4949.39,804.39 ; v1@4960,830 cw(c4923.79,830) 4949.39,804.39 ; v1@4975,815 ccw(c4975,778.79) 4949.39,804.39 ; v1(4975,830) 4949.39,804.39 ; 2794.06,2339.06 v1(2810,2355) 2828,2373
  Bottom Layer w10: v1@1304.39,2099.39 cw(c1278.79,2073.79) 1315,2073.79 cw(c1351.21,2073.79) v1@1325.61,2099.39 ; v1(1315,2110) 1315,2045 v1(1365,1995) ; v1@1350,1995 ccw(c1313.79,1995) 1339.39,2020.61 ccw(c1365,2046.21) v1@1365,2010 ; v1@1730,2090 cw(c1730,2053.79) 1755.61,2079.39 cw(c1781.21,2105) v1@1745,2105 ; v1(1730,2105) 1803.46,2031.54 1839.72,2031.54 2214.18,2406 2759,2406 v1(2810,2355) ; v1@2795,2355 ccw(c2758.79,2355) 2784.39,2380.61 ccw(c2810,2406.21) v1@2810,2370 ; v1(3915,825) 3935,845 4059.09,845 4093.09,811 4916.91,811 4935.91,830 v1(4975,830) ; v1@4964.39,819.39 ccw(c4938.79,793.79) 4938.79,830 ccw(c4938.79,866.21) v1@4964.39,840.61
SPI_SCK: U4.8 U5.16 U7.52 U9.6 | length 6059.6
  Top Layer w10: U4.8@1284.84,1857.24 1284.84,1925 1310,1950.16 1310,1995 1365,2050 ; U9.6@1365,2158.15 1365,2050 ; v1(1780,2125) 1767,2138 1693,2138 1655,2100 1415,2100 1365,2050 ; U7.52@2833.43,2207.28 2833.43,2268.43 ; 2843.85,2278.85 cw(c2865.77,2256.94) v1@2878.02,2285.41 ; 2854.28,2289.28 cw(c2872.05,2271.52) v1@2881.98,2294.59 ; v1@2866.76,2282.94 ccw(c2855,2276.67) 2855,2290 ; v1@2866.76,2297.06 cw(c2855,2303.33) 2855,2290 ; v1@2874.07,2276.22 ccw(c2859.5,2242.36) 2833.43,2268.43 ; 3971.72,770 ccw(c3971.72,823.28) v1@4009.39,785.61 ; v1@4009.39,764.39 ccw(c3995.86,750.86) 3995.86,770 ccw(c3995.86,799.14) v1@4016.46,778.54 ; v1(4020,775) 4015,770 3732.28,770 3645,857.28 3645,1093.01 3681.9,1129.91 3681.9,1749.46 3331.35,2100 3180,2100 2990,2290 v1(2880,2290) 2855,2290 ; v1(4875,760) 4899.39,735.61 U5.16@4899.39,682.4 ; 2833.43,2268.43 2855,2290
  Bottom Layer w10: v1(1780,2125) 1882.27,2125 2199.27,2442 2853,2442 2898,2397 2898,2308 v1(2880,2290) ; v1@1790.61,2114.39 cw(c1816.21,2088.79) 1816.21,2125 cw(c1816.21,2161.21) v1@1790.61,2135.61 ; v1@4016.46,771.46 ccw(c4041.73,796.73) 4041.73,761 ; v1(4020,775) 4034,761 4874,761 v1(4875,760) ; v1@4023.54,778.54 ccw(c4065.87,820.87) 4065.87,761 ; v1@4030.61,785.61 ccw(c4090.01,845.01) 4090.01,761 ; 4836.37,761 cw(c4836.37,721.37) v1@4864.39,749.39 ; 4841.2,761 ccw(c4841.2,793.8) v1@4864.39,770.61
U5V: C2.2 J4.1 JP1.2 R11.2 U2.5 | length 886
  Top Layer w10: J4.1@461.89,850.04 J4.1@461.89,855.04
  Top Layer w20: 700,795 700,805 700,830 715,845 ; 710,805 715,810 ; 715,805 715,810 ; U2.5@765,980 735,980 715,960 715,845 ; 715,810 715,845
  Top Layer w30: J4.1@461.89,855.04 466.89,850.04 549.96,850.04 595,805 C2.2@645,805 700,805 710,805 715,805 R11.2@760,805 ; JP1.2@590,555 700,665 700,795
VBAT: D4.2 D5.2 U7.6 | length 3281.8
  Top Layer w10: D5.2@1235,3050 1165,2980 1165,2860 D4.2@1235,2790 1235,2775 v1(1310,2700) ; v1@1919.39,2654.39 cw(c1893.79,2628.79) 1930,2628.79 cw(c1966.21,2628.79) v1@1940.61,2654.39 ; v1(1930,2665) 1930,2385 1973,2342 1973,2024.71 2085,1912.71 ; 2043.34,1954.37 cw(c1978.97,1890) v1@2070,1890 ; 2060.41,1937.3 cw(c2013.11,1890) v1@2080,1890 ; 2077.48,1920.23 cw(c2047.25,1890) v1@2090,1890 ; v1@2079.11,1903.8 ccw(c2075.31,1912.71) 2085,1912.71 ; v1(2085,1890) 2085,1912.71 ; v1@2090.89,1903.8 cw(c2094.69,1912.71) 2085,1912.71 ; v1@2220,1525 cw(c2220,1488.79) 2245.61,1514.39 cw(c2271.21,1540) v1@2235,1540 ; v1(2220,1540) 2270,1490 2415,1490 2479.09,1554.09 U7.6@2479.09,1612.8
  Bottom Layer w10: v1@1310,2685 cw(c1310,2648.79) 1335.61,2674.39 cw(c1361.21,2700) v1@1325,2700 ; v1(1310,2700) 1360,2650 1915,2650 v1(1930,2665) ; 1857.57,2650 ccw(c1857.57,2737.43) v1@1919.39,2675.61 ; 1881.72,2650 ccw(c1881.72,2713.28) v1@1926.46,2668.54 ; 1905.86,2650 ccw(c1905.86,2689.14) v1@1933.54,2661.46 ; v1@2077.94,1876.76 cw(c2071.67,1865) 2085,1865 ; v1(2085,1890) 2085,1865 ; v1@2092.06,1876.76 ccw(c2098.33,1865) 2085,1865 ; v1@2209.39,1550.61 ccw(c2183.79,1576.21) 2220,1576.21 ccw(c2256.21,1576.21) v1@2230.61,1550.61 ; v1(2220,1540) 2220,1730 2085,1865
VCC3V3: C16.2 C17.2 C18.2 C19.2 C20.2 C24.2 C29.2 C48.2 C49.2 D3.1 D5.1 L1.1 L4.1 L6.1 L9.1 P2.4 R6.1 R8.1 R13.2 R24.2 R27.2 R40.2 R41.2 T1.3 U4.15 U4.19 U4.20 U4.25 U4.28 U9.8 U10.2 U10.4 | length 14068.3
  Top Layer w20: P2.4@145,2590 465,2590 v1(630,2425) 840,2215 1245,2215 1295,2265 1447.5,2265 ; R41.2@457.5,2875 R40.2@560,2875 v1(630,2875) 630,3030 770,3170 900,3170 ; R41.2@468.11,2864.39 cw(c493.71,2838.79) 493.71,2875 cw(c493.71,2911.21) R41.2@468.11,2885.61 ; R40.2@549.39,2864.39 ccw(c523.79,2838.79) 523.79,2875 ccw(c523.79,2911.21) R40.2@549.39,2885.61 ; R40.2@570.61,2864.39 cw(c596.21,2838.79) 596.21,2875 cw(c596.21,2911.21) R40.2@570.61,2885.61 ; D3.1@789.39,3125.61 ccw(c763.79,3151.21) 800,3151.21 ccw(c836.21,3151.21) D3.1@810.61,3125.61 ; D3.1@800,3110 800,3165 ; R6.1@892.73,3125.61 ccw(c867.12,3151.21) 903.33,3151.21 ccw(c939.55,3151.21) R6.1@913.94,3125.61 ; R6.1@903.33,3110 903.33,3166.67 900,3170 ; T1.3@970,560 1035,625 1035,805 ; U4.15@984.84,1502.91 984.84,1377.09 L1.1@996.89,1365.04 1002.06,1370.21 C18.2@1101.14,1370.21 C20.2@1196.39,1370.21 ; L1.1@1007.5,1359.43 cw(c1033.52,1333.41) 1033.52,1370.21 ; L1.1@1007.5,1380.65 ccw(c1032.69,1405.84) 1032.69,1370.21 ; C18.2@1090.53,1359.6 ccw(c1064.93,1334) 1064.93,1370.21 ccw(c1064.93,1406.42) C18.2@1090.53,1380.82 ; R8.1@1099.39,3125.61 ccw(c1073.79,3151.21) 1110,3151.21 ccw(c1146.21,3151.21) R8.1@1120.61,3125.61 ; R8.1@1110,3110 1110,3170 ; C18.2@1111.75,1359.6 cw(c1137.35,1334) 1137.35,1370.21 cw(c1137.35,1406.42) C18.2@1111.75,1380.82 ; U4.19@1184.84,1502.91 1184.84,1401.26 ; C20.2@1185.25,1385.26 ccw(c1176.63,1393.04) 1184.84,1401.26 ; C20.2@1185.78,1359.6 ccw(c1160.18,1334) 1160.18,1370.21 ccw(c1160.18,1406.42) C20.2@1185.78,1380.82 ; C20.2@1205.89,1380.21 1199.84,1386.26 C20.2@1196.39,1370.21 ; C20.2@1207,1359.6 cw(c1232.6,1334) 1232.6,1370.21 cw(c1232.6,1406.42) C20.2@1207,1380.82 ; D5.1@1235,3185 1220,3170 1110,3170 ; C19.2@1281.03,1359.6 ccw(c1255.43,1334) 1255.43,1370.21 ccw(c1255.43,1406.42) C19.2@1281.03,1380.82 ; U9.8@1459.36,2225.78 ccw(c1416.81,2234.31) 1447.5,2265 ; U9.8@1465,2193.15 1465,2247.5 1447.5,2265 ; 1516.72,2265 cw(c1516.72,2211.72) C29.2@1554.39,2249.39 ; C17.2@1621.28,1384.82 ccw(c1588.55,1417.55) 1634.84,1417.55 ; C17.2@1631.89,1369.21 1634.84,1372.16 1634.84,1430 ; 1634.84,1403.3 ccw(c1660.97,1403.3) C17.2@1642.5,1384.82 ; U4.28@1634.84,1502.91 1634.84,1430 ; R27.2@1665,2345 1585,2265 1447.5,2265 ; C24.2@4705,815 R24.2@4805,815 v1(4805,965) ; C24.2@4715.61,804.39 cw(c4741.21,778.79) 4741.21,815 cw(c4741.21,851.21) C24.2@4715.61,825.61 ; R24.2@4794.39,804.39 ccw(c4768.79,778.79) 4768.79,815 ccw(c4768.79,851.21) R24.2@4794.39,825.61 ; R24.2@4794.39,830.61 ccw(c4768.79,856.21) 4805,856.21 ccw(c4841.21,856.21) R24.2@4815.61,830.61 ; 900,3170 1110,3170 ; 1184.84,1401.26 1196.39,1389.71 C20.2@1196.39,1370.21 ; C20.2@1196.39,1370.21 C19.2@1291.64,1370.21 1291.64,1398.36 1234.84,1455.16 U4.20@1234.84,1502.91 1234.84,1604.84 1265,1635 1430,1635 1484.84,1580.16 U4.25@1484.84,1502.91 1484.84,1462.09 1516.93,1430 1634.84,1430
  Top Layer w30: L1.1@1002.06,1370.21 L1.1@1006.89,1375.04 ; C20.2@1184.84,1381.76 C20.2@1196.39,1370.21 ; U10.4@4911.62,1642.77 cw(c4886.82,1617.97) 4921.89,1617.97 cw(c4956.96,1617.97) U10.4@4932.16,1642.77 ; U10.2@4921.89,1405.04 U10.4@4921.89,1653.04
  Top Layer w40: R13.2@970,805 1035,805 1075,845 1760,845 ; v1(1565,2170) C29.2@1565,2255 ; C17.2@1637.72,1375.04 C17.2@1631.89,1369.21 v1(1759.21,1369.21) 1759.21,845.79 1760,845 ; v1(2925,845) 1760,845 ; L9.1@3230,1445 3335,1445 L4.1@3345,1435 C16.2@3345,1250 3350,1255 v1(3350,1340) ; C16.2@3337.93,1257.07 ccw(c3308.79,1286.21) 3350,1286.21 ; v1(4595,1275) L6.1@4685,1275 L6.1@4685,1275 C49.2@4809.39,1275.04 C48.2@4916.89,1275.04 4921.89,1280.04 U10.2@4921.89,1405.04 ; C48.2@4909.82,1282.11 ccw(c4880.68,1311.25) 4921.89,1311.25
  Bottom Layer w20: v1@622.93,2432.07 ccw(c605.86,2449.14) 630,2449.14 ccw(c654.14,2449.14) v1@637.07,2432.07 ; v1@622.93,2867.93 cw(c605.86,2850.86) 630,2850.86 cw(c654.14,2850.86) v1@637.07,2867.93 ; v1(630,2425) v1(630,2875) ; v1@4595,1265 cw(c4595,1240.86) 4612.07,1257.93 cw(c4629.14,1275) v1@4605,1275 ; v1(4595,1275) 4805,1065 v1(4805,965) ; v1@4797.93,972.07 ccw(c4780.86,989.14) 4805,989.14 ccw(c4829.14,989.14) v1@4812.07,972.07
  Bottom Layer w40: 1575.61,2144.39 cw(c1601.21,2170) v1(1565,2170) 1565,2155 1759.21,1960.79 v1(1759.21,1369.21) ; v1(2925,845) 3115,845 3350,1080 v1(3350,1340) 3435,1425 4250,1425 4400,1275 v1(4595,1275)
VCC5V: C21.2 C46.2 C47.2 JP1.1 L2.2 L3.1 L10.1 L11.1 L12.1 P2.6 U10.3 | length 15957.9
  Top Layer w40: P2.6@145,2390 95,2390 60,2425 60,3055 295,3290 1290,3290 1480,3100 1800,3100 v1(2055,3355) ; v1(2940,3485) v1(3735,3485) ; L2.2@4405,880 4470,880 ; C21.2@4520,835 4475,880 4470,880 ; U10.3@5011.89,1405.04 5011.89,1360.04 5024.39,1347.54 C47.2@5024.39,1275.04 5100,1275.04 ; 5095.68,1275.04 cw(c5095.68,1233.83) C46.2@5124.82,1262.97 ; C46.2@5141.89,1270.04 cw(c5190.17,1270.04) 5156.03,1304.18 ; v1(5195,1040) 4630,1040 4470,880 ; v1(5195,1410) 5195,1343.15 5131.89,1280.04 C46.2@5131.89,1275 ; L3.1@5315,1200 5260,1200 5189.96,1270.04 C46.2@5131.89,1270.04 ; 5100,1275.04 cw(c5100,1243.64) C46.2@5124.19,1263.66 ; 5100,1275.04 cw(c5100,1243.64) C46.2@5124.19,1263.66 ; 5100,1275.04 5126.89,1275.04 C46.2@5126.93,1275 ; 5100,1275.04 5100.04,1275 ; 5100.04,1275 cw(c5100.04,1243.62) C46.2@5124.19,1263.65 ; 5100.04,1275 C46.2@5126.93,1275 ; C46.2@5126.93,1275 C46.2@5131.89,1270.04 ; C46.2@5126.93,1275 C46.2@5131.89,1275 ; C46.2@5131.89,1270.04 C46.2@5131.89,1275
  Bottom Layer w40: JP1.1@590,455 590,385 620,355 2610,355 2690,435 4025,435 4120,340 5200,340 5320,460 5320,915 v1(5195,1040) v1(5195,1410) 5195,1650 5040,1805 4680,1805 4620,1865 4620,3460 L11.1@4605,3475 ; v1(2055,3355) L10.1@2055,3470 2058,3473 2928,3473 v1(2940,3485) cw(c2911.03,3513.97) 2911.03,3473 ; v1(3735,3485) L11.1@4595,3485 ; L11.1@4600,3480 L11.1@4595,3485 ; L11.1@4601.46,3471.46 cw(c4556.72,3426.72) 4620,3426.72 ; L11.1@4605,3480 4600,3485 L11.1@4595,3485
VDD: C34.2 C35.2 C36.2 C37.2 C38.2 L4.2 U7.11 U7.28 U7.50 U7.75 U7.100 | length 2965.6
  Top Layer w10: U7.100@2319.65,1673.82 2383.82,1673.82 2410,1700 ; U7.75@2380.67,2207.28 2380.67,2124.33 v1(2415,2090) ; v3@2428,1691 ccw(c2410,1677.5) 2410,1700 ; v3@2428,1709 cw(c2410,1722.5) 2410,1700 ; v3(2440,1700) 2410,1700 ; U7.11@2577.52,1612.8 v3(2577.5,1700) ; v3(2810,2110) 2846.26,2146.26 U7.50@2914.13,2146.26 ; v3(2835,1715) 2835.13,1714.87 2912.45,1714.87 U7.28@2914.13,1713.19 2858.74,1713.19 ; v3@2847.74,1707.08 cw(c2858.74,1700.23) 2858.74,1713.19 ; v3@2849.15,1719.98 ccw(c2858.74,1723.36) 2858.74,1713.19 ; 2878.35,1714.87 cw(c2878.35,1706.93) U7.28@2883.97,1712.55
  Top Layer w30: v1(2975,1555) 3005,1525 L4.2@3345,1525
  Bottom Layer w10: v3@2440,1690 v3@2450,1700 ; C38.2@2645,1700 C38.2@2655,1690
  Bottom Layer w30: v1(2415,2090) 2430,2105 C36.2@2500,2105 2625,2105 ; v1@2418.54,2086.46 cw(c2463.28,2041.72) 2463.28,2105 ; v3(2440,1700) 2450,1700 C35.2@2510,1700 v3(2577.5,1700) C38.2@2645,1700 2705,1700 ; 2785.86,2105 ccw(c2785.86,2134.14) v3@2806.46,2113.54 ; C34.2@2786.72,1700 ccw(c2786.72,1763.28) v3@2831.46,1718.54 ; v3(2810,2110) 2805,2105 C37.2@2745,2105 2625,2105 ; v3(2835,1715) v3@2835,1700 ; 2850.61,1689.39 cw(c2876.21,1715) 2840,1715 ccw(c2900.36,1715) 2857.68,1672.32 ; 2959.39,1580.61 cw(c2933.79,1555) v1@2970,1555 ; v1(2975,1555) 2835,1695 v3@2835,1700 ; v1@2975,1565 2840,1700 v3@2835,1700 ; 2625,2105 2625,1975 2705,1895 2705,1700 ; 2705,1700 C34.2@2765,1700 v3@2835,1700
VDDA: C40.2 C41.2 L9.2 R2.1 U7.22 | length 787.9
  Top Layer w10: U7.22@2794.06,1612.8 2794.06,1555.94 2835,1515 2945,1515 C41.2@3010,1450 ; C41.2@3020,1445 C40.2@3120,1445 3130,1445 3220,1355 L9.2@3230,1355
  Top Layer w20: L9.2@3219.39,1339.39 cw(c3193.79,1313.79) 3230,1313.79 cw(c3266.21,1313.79) L9.2@3240.61,1339.39 ; L9.2@3230,1355 3230,1195 R2.1@3235,1190
X+: P5.1 U5.2 | length 874.6
  Top Layer w16: U5.2@4924.39,477.68 4924.39,539.39 4940,555 5095,555 5135,595 5215,595 5250,560 5250,370 5141.89,261.89 P5.1@5141.89,155.04
X-: P5.3 U5.4 | length 334.8
  Top Layer w16: P5.3@4945.04,155.04 4945.04,268.19 4974.39,297.54 U5.4@4974.39,477.68
Y+: P5.4 U5.3 | length 365.2
  Top Layer w16: P5.4@4846.61,155.04 4846.61,234.76 4949.39,337.54 U5.3@4949.39,477.68
Y-: P5.2 U5.5 | length 340.9
  Top Layer w16: U5.5@4999.39,477.68 4999.39,302.54 5043.46,258.46 P5.2@5043.46,155.04
pads on no net: BAT1.0 J24.0 J24.5 U3.7 U3.8 U3.9 U3.10 U3.11 U3.12 U3.14 U3.16 U3.18 U3.19 U3.20 U3.31 U3.32 U3.33 U3.34 U3.35 U3.36 U3.37 U3.38 U3.39 U3.43 U3.44 U3.45 U3.46 U3.47 U3.48 U3.49 U3.50 U3.A U3.B U3.C U5.13 U7.73 U8.3 U14.5 U14.7 U14.A U14.B Y1.2 Y1.3
copper on no net:
  other v2: 2320,3850

## Polygon pours and split planes (outlines as drawn)
GND on Top Layer "Bottom Layer-No Net" (solid, remove dead copper, pour order 4): 5708.66,2195 4665,2195 4560,2300 4560,3240 4840,3520 5000,3680 5000,3940 497.99,3940 495,3937.01 495,3520 460,3485 430,3455 0,3455 0,2180 760,2180 765,2175 775,2165 775,1935 775,1285 630,1140 625,1145 0,1145 0,440 420,440 460,400 470,390 470,0 5240,0 5240,355 5320,435 5365,480 5708.66,480
GND on Bottom Layer "Bottom Layer-No Net" (solid, remove dead copper, pour order 3): 5708.66,2195 4665,2195 4560,2300 4560,3240 4840,3520 5000,3680 5000,3940 497.99,3940 495,3937.01 495,3520 460,3485 430,3455 0,3455 0,2180 760,2180 765,2175 775,2165 775,1935 775,1285 630,1140 625,1145 0,1145 0,440 420,440 460,400 470,390 470,0 5240,0 5240,355 5320,435 5365,480 5708.66,480

## Keep-outs
Keep-Out Layer:
  lines w10: 0,0 5708.66,0 5708.66,3937.01 0,3937.01 0,0

## Other copper
Top Layer:
  text "VER1.1" at 5675,590 h78.74 r90
  text "MainBoard" at 5560,560 h78.74 r90

## Silkscreen, mask and mechanical layers (free items; w line width, h text height)
Top Overlay:
  text "-" at 5525,3445 h78.74 r90
  text "DC24V" at 5660,3440 h40 r90
  text "+" at 5530,2940 h78.74 r90

## Text inside footprints (layer, text, board x,y; h text height)
P3: Top Overlay "30" at 4520,220 h50; Top Overlay "29" at 4520,120 h50; Top Overlay "2" at 2960,220 h50; Top Overlay "1" at 2960,120 h50
U1: Top Overlay "+OUT" at 4715,2240 h40 r270; Top Overlay "-OUT" at 5515,2240 h40 r270; Top Overlay "COM" at 5115,2215 h40 r270; Top Overlay "+IN" at 4890,2840 h40 r270; Top Overlay "-IN" at 5340,2840 h40 r270